# Altium PCB download_fc.PcbDoc
Units mil, origin at the board's own origin, x right, y up, seen from the top; angles counter-clockwise.
Board outline 815 x 515 mil, 2 copper layers (Top Layer, Bottom Layer); 7 components, 5 nets, 29 pads, 8 vias.
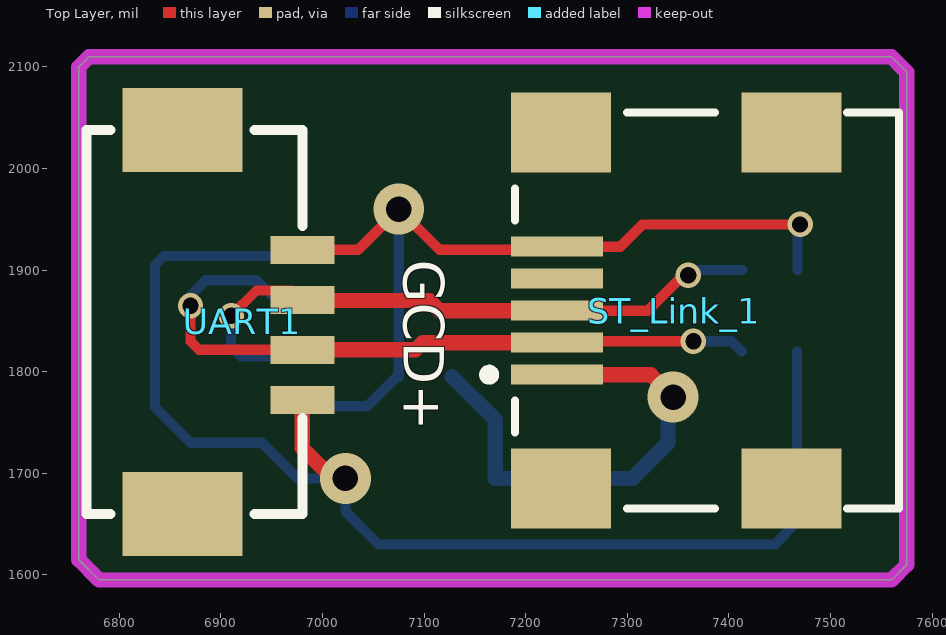
[diagram p0: Top Layer view]
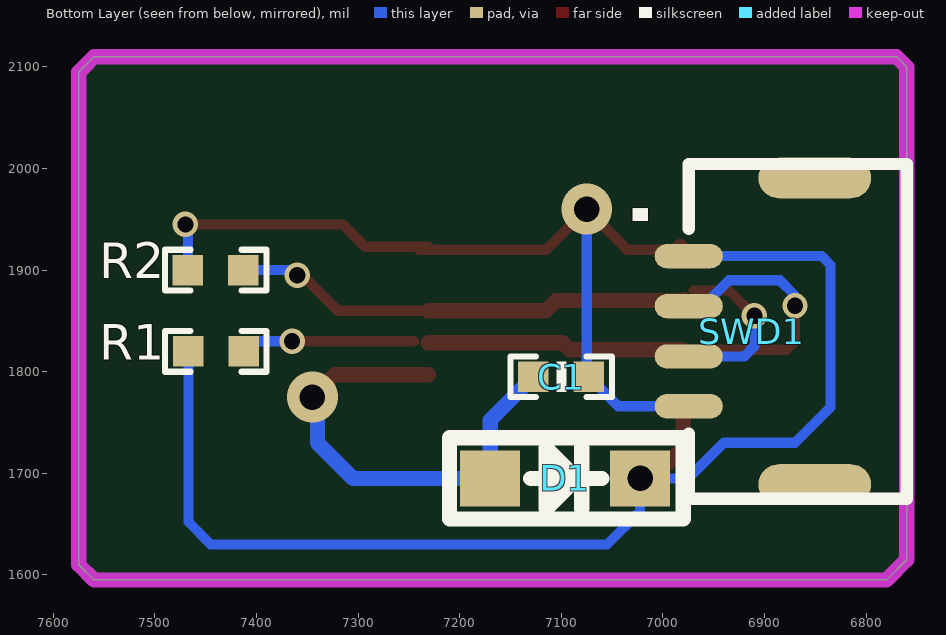
[diagram p1: Bottom Layer view, seen from below]

## Layer stack, top to bottom
Top Layer: signal copper 1.4
Dielectric: dielectric 12.6, FR-4, Dk 4.8
Bottom Layer: signal copper 1.4

## Board outline
6760,1615 6760,2100 6770,2110 7560,2110 7570,2100 7575,2095 7575,1610 7560,1595 6780,1595

## Design rules (kind name [scope] priority, off if disabled: settings)
Clearance [All] p1: gap=10
ComponentClearance [All] p1: gap=10 collisioncheckmode=3 verticalgap=10
PolygonConnect [All] p1: connectstyle=Relief reliefconductorwidth=10 reliefentries=4 polygonreliefangle="90 Angle"
RoutingVias [All] p1: holewidth=28 width=50 viastyle="Through Hole" minholewidth=16 minwidth=25 maxholewidth=28 maxwidth=50
SolderMaskExpansion [All] p1: expansion=4
TestPointUsage [All] p1: valid=0 allowmultiple=FALSE
Testpoint [All] p1: side=15 testpointundercomponent=TRUE minsize=40 maxsize=100 preferedsize=60 minholesize=0 maxholesize=40 preferedholesize=32 testpointgrid=1 style=1023 order=0123456789
Width [All] p1: maxlimit=10 minlimit=10 preferedwidth=10
18 further rules are at their usual default settings.

## Components (designator, comment, footprint, x,y, rotation, side; value= is the part's Value field where it differs from the comment)
C1 "0.1UF" C0603 7100,1795 r0 bottom
D1 "1N4148" 1n4148-SOD123 7160,1695 r180 bottom
R1 "0R" R0603 7440,1820 r180 bottom
R2 "0R" R0603 7440,1900 r0 bottom
ST_Link_1 "USB5" USB/SM0.8-6H5_M 7540,1860 r0 top
SWD1 "Header 4" JST_GH_V4 6760,1840 r270 bottom
UART1 "Header 4" PH1.25_4 6980,1920 r270 top

## Footprints (in the part's own frame and the unit in brackets; to place one, negate y for a bottom-side part, rotate by r counter-clockwise, add the part's x,y. Pads: shape width x height; smd on the part's side, far side on the other; paste and mask are expansions set on the pad)
1n4148-SOD123 [mm]
  rect 1.5x1.4 smd: 1(-0.254,0) 2(3.494,0)
  silkscreen extent -1.27,-1.02 4.57,1.02, body extent -0.25,-0.85 3.6,0.85, height 1.42
C0603 [mil]
  rect 30x30 smd: 1(-27,0) 2(27.5,-0.06)
  silkscreen extent -50,-20 50,20, body extent -31,-16 32,16, height 12
JST_GH_V4 [mil]
  rrect100% 24x67 smd: 1(-73.82,-214.57) 2(-24.61,-214.57) 3(25,-214.57) 4(74,-214.57)
  rrect100% 40x111 smd: GND(-150.59,-90.55) GND(151,-90.55)
  silkscreen extent -164,-215 165,0, body extent -162,-235 163,-40, height 165
PH1.25_4 [mm]
  rect 0.7x1.6 smd: 1(0,0) 2(1.25,0) 3(2.5,0) 4(3.75,0)
  rect 2.1x3 smd: ""(-3,-3) ""(6.6,-3)
  silkscreen extent -3,-5.4 6.6,0
R0603 [mil]
  rect 30x30 smd: 1(-27,0) 2(27.5,-0.06)
  silkscreen extent -50,-20 50,20, body extent -31,-16 32,16, height 12
USB/SM0.8-6H5_M [mm]
  rect 2.3x0.5 smd: 1(-7.85,-1.6) 2(-7.85,-0.8) 3(-7.85,0) 4(-7.85,0.8) 5(-7.85,1.6)
  rect 2.5x2 smd: 6(-7.75,4.45) 7(-1.996,4.45) 8(-7.75,-4.45) 9(-1.996,-4.45)
  silkscreen extent -9.67,-4.95 0.7,4.95

## Part data
C1: library part CAP, "Capacitor"
D1: "二极管"
R1 R2: library part Res2, "0603"
SWD1 UART1: "Header, 4-Pin"

## Via types
v1: diameter 25, hole 16, Top Layer to Bottom Layer, 5 vias
v2: diameter 50, hole 25, Top Layer to Bottom Layer, 3 vias

## Nets (pads, with @x,y where several pads share a name; then routed paths per layer and width w, separated by ;. In a path a pad name is that pad's centre, name@x,y a point inside that pad or via, vN(x,y) a via of type N, cw(c..) or ccw(c..) an arc to the next point about the centre after c; other vN are vias at no path point)
5V: D1.2 R1.1 SWD1.1 UART1.4 | length 1271.3
  Top Layer w15: UART1.4@6980,1770 6980,1725 7015,1690 7017.44,1690 v2(7022.44,1695)
  Bottom Layer w10: SWD1.1 6843.82,1913.82 6835,1905 6835,1765 6870,1730 6940,1730 6975,1695 v2(7022.44,1695) 7022.44,1662.56 7055,1630 7445,1630 7467,1652 R1.1
CLK_C8: R2.1 ST_Link_1.3 SWD1.3 UART1.2 | length 619
  Top Layer w10: v1(6910,1855) 6935,1880 UART1.2@6970,1880 ; ST_Link_1.3@7235,1860 7320,1860 7355,1895 v1(7360,1895)
  Top Layer w15: UART1.2 6980.79,1870 7105,1870 7115,1860 ST_Link_1.3
  Bottom Layer w10: v1(6910,1855) 6910,1825 6920,1815 SWD1.3 ; v1(7360,1895) 7365,1900 R2.1
GND: C1.1 R2.2 ST_Link_1.5 SWD1.4 UART1.1 | length 872.4
  Top Layer w10: UART1.1@6974.57,1920 7035,1920 v2(7075,1960) 7115,1920 ST_Link_1.5@7240,1920 ; ST_Link_1.5 7292.99,1922.99 7315,1945 v1(7470,1945)
  Top Layer w15: UART1.1 UART1.1@6982.99,1922.99
  Bottom Layer w10: SWD1.4 7044,1766 C1.1 ; C1.1@7075,1795 v2(7075,1960) ; R2.2 7467.5,1942.5 v1(7470,1945)
NetC1_2: C1.2 D1.1 ST_Link_1.1 | length 472.4
  Top Layer w15: ST_Link_1.1 7322.99,1797.01 v2(7345,1775)
  Bottom Layer w15: C1.2 7170,1752.56 D1.1 7305,1695 7340,1730 7340,1770 v2(7345,1775)
SWD: R1.2 ST_Link_1.2 SWD1.2 UART1.3 | length 705.3
  Top Layer w10: v1(6870,1865) 6870,1830 6878.43,1821.57 UART1.3 ; ST_Link_1.2@7245,1830 v1(7365,1830)
  Top Layer w15: UART1.3 7091.57,1821.57 7098.5,1828.5 ST_Link_1.2
  Bottom Layer w10: v1(6870,1865) 6870,1875 6885,1890 6935,1890 6960.39,1864.61 SWD1.2 ; v1(7365,1830) 7402.44,1830 R1.2
pads on no net: ST_Link_1.4 ST_Link_1.6 ST_Link_1.7 ST_Link_1.8 ST_Link_1.9 SWD1.GND UART1.

## Keep-outs
Keep-Out Layer:
  the board outline again, w15

## Silkscreen, mask and mechanical layers (free items; w line width, h text height)
Top Overlay:
  text "GCD+" at 7080,1910 h40 r270